# Altium PCB Eval_Board_Rev1.PcbDoc
Units mm, origin at the board's own origin, x right, y up, seen from the top; angles counter-clockwise.
Board outline 60 x 45 mm, 2 copper layers (Top Layer, Bottom Layer); 37 components, 15 nets, 82 pads, 13 vias.
Unrouted connection lines stored in the file: 2.
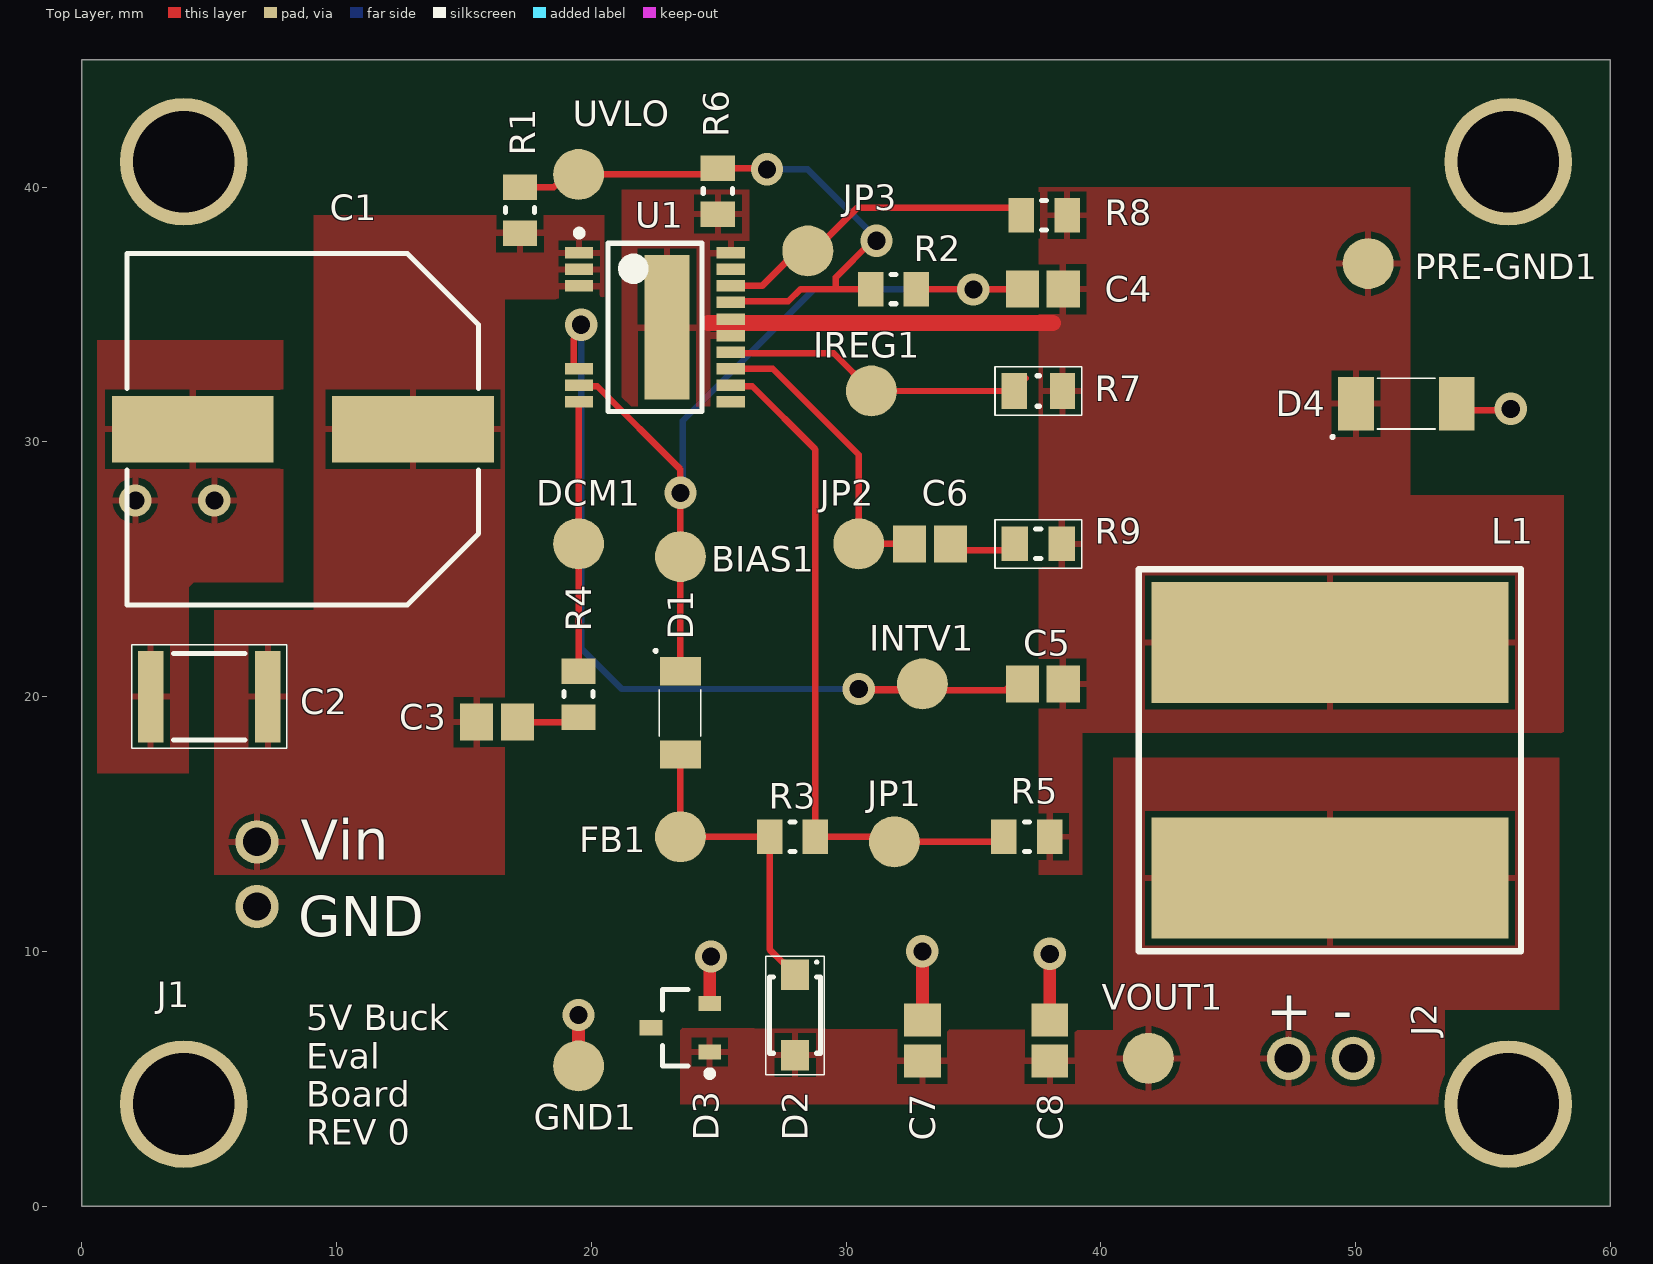
[diagram p0: Top Layer view]
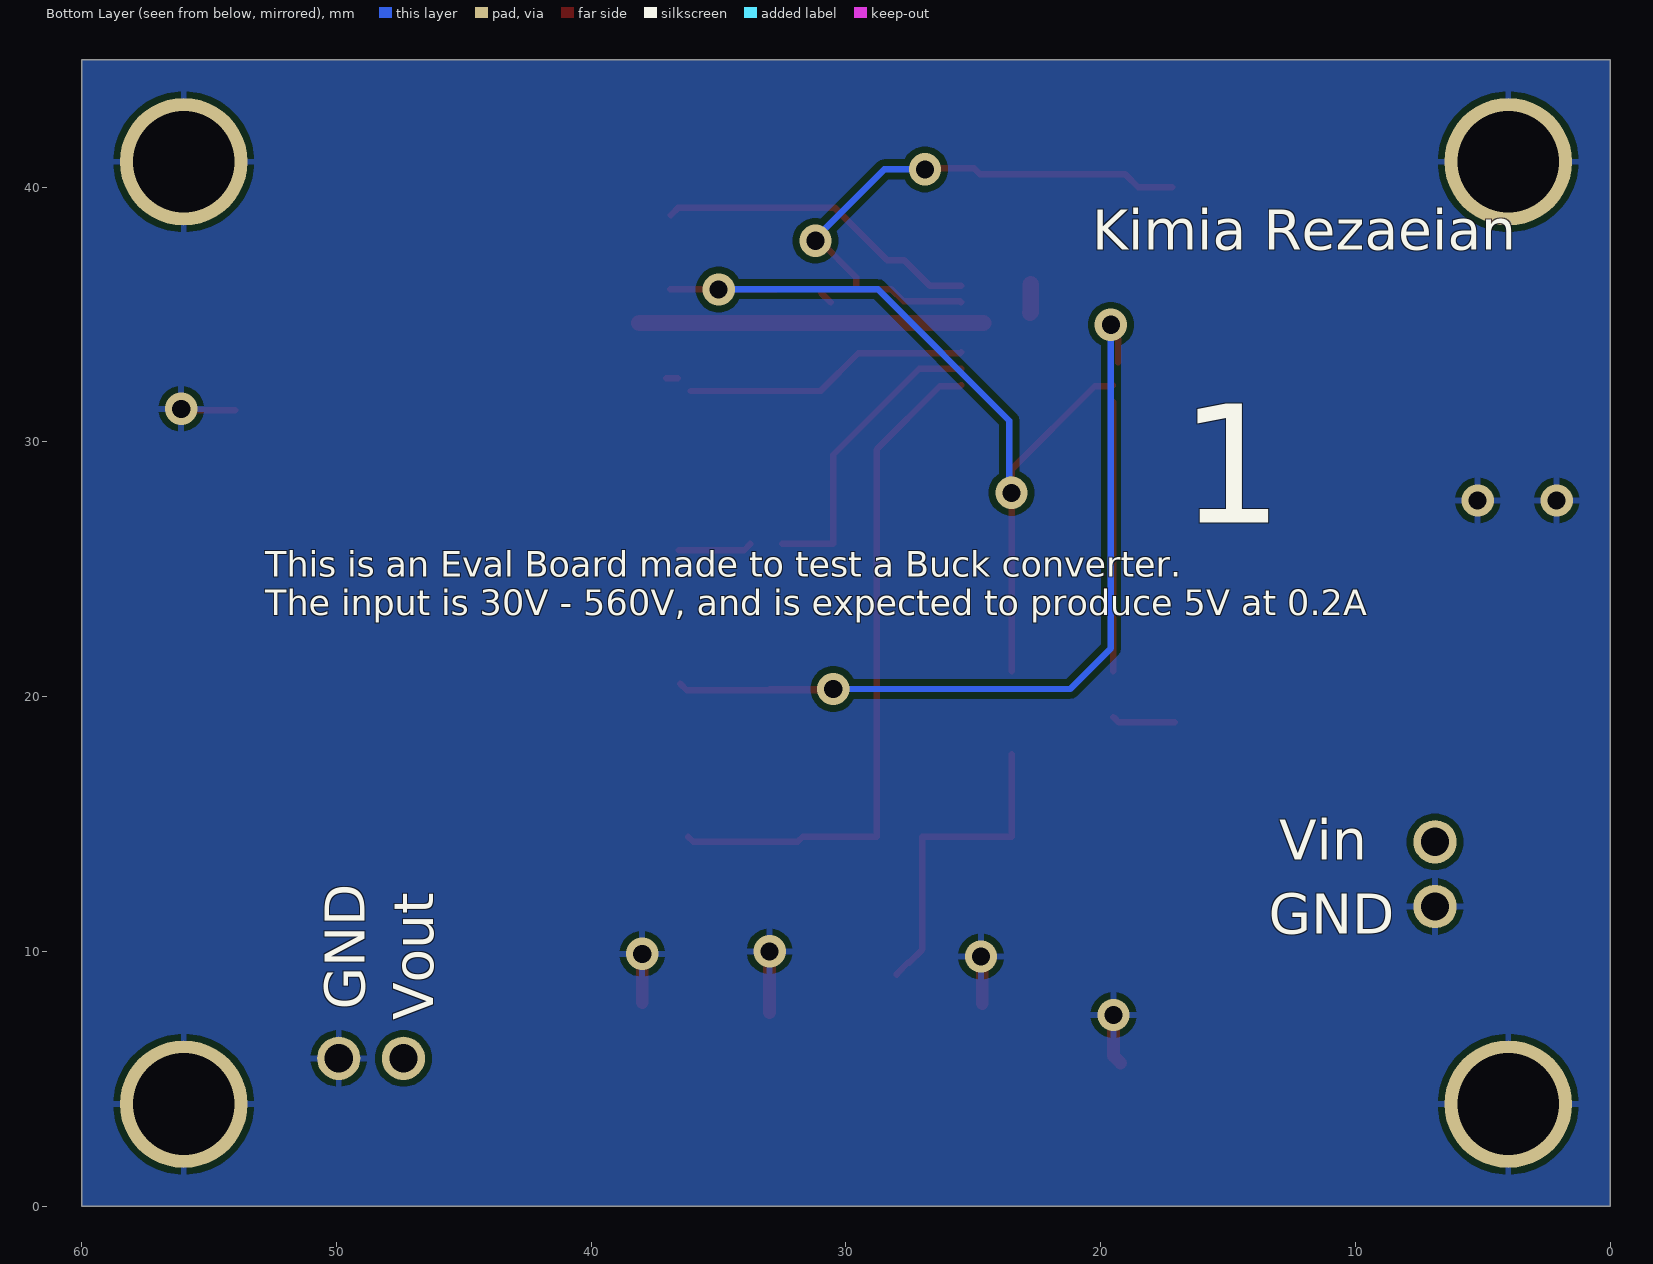
[diagram p1: Bottom Layer view, seen from below]
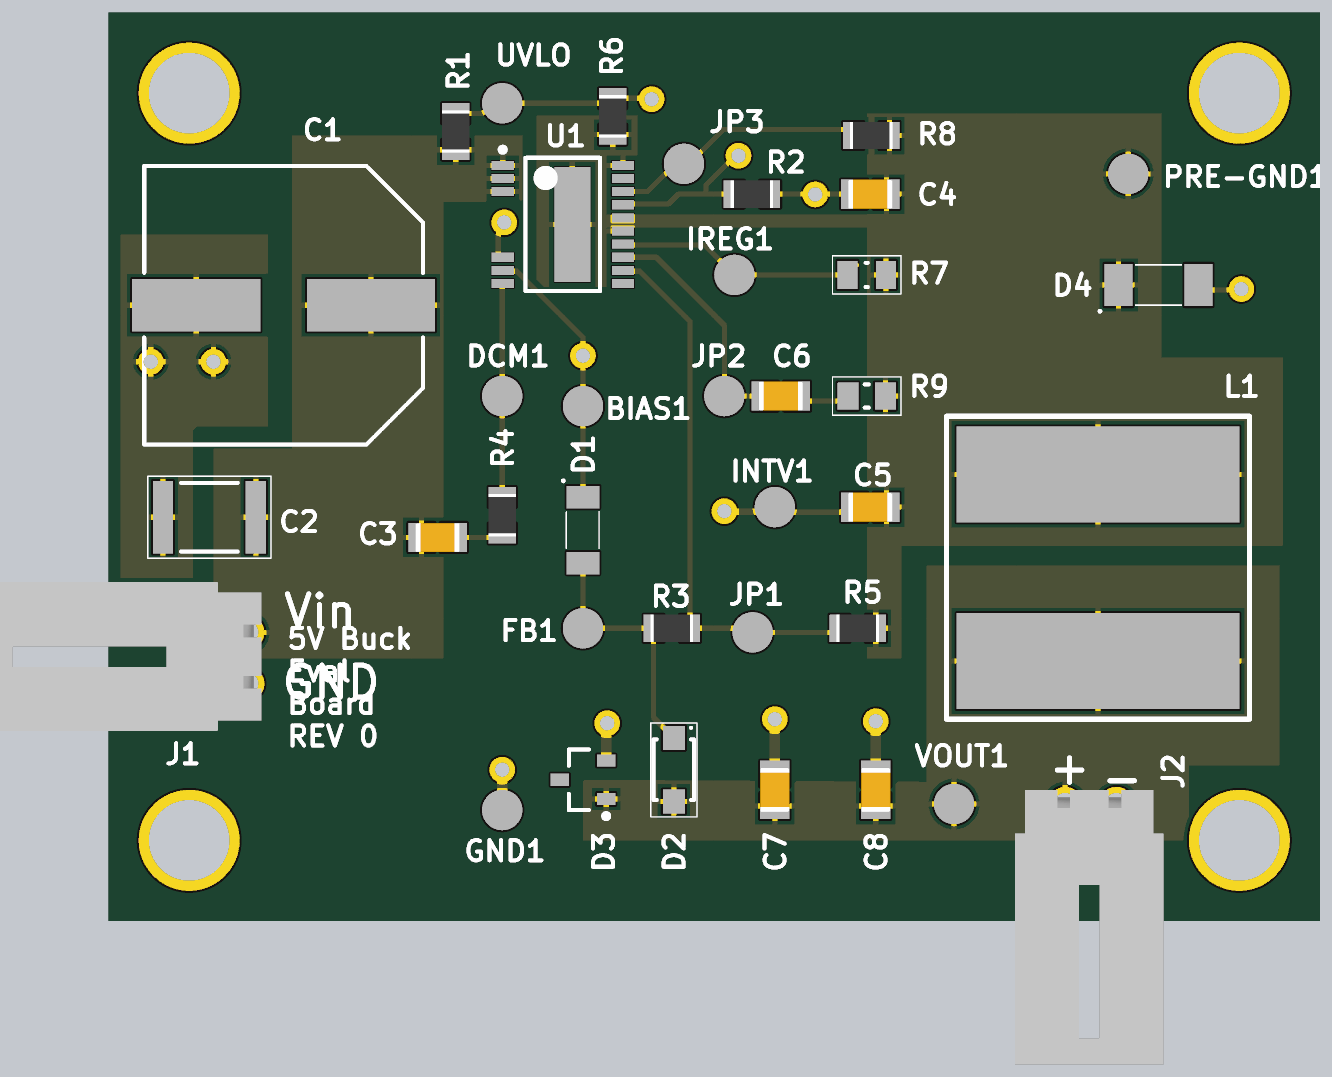
[diagram p2: 3D render of the assembled board from above, using the file's embedded part models]

## Layer stack, top to bottom
Top Solder: solder mask 0.0102, Solder Resist, Dk 3.5
Top Layer: signal copper 0.0356
Dielectric 1: dielectric 0.32, FR-4, Dk 4.8
Bottom Layer: signal copper 0.0356
Bottom Solder: solder mask 0.0102, Solder Resist, Dk 3.5

## Board outline
0,0 60,0 60,45 0,45

## Design rules (kind name [scope] priority, off if disabled: settings)
Clearance [All] p1: gap=0.254 ignorepadtopadclearanceinfootprint=TRUE except(0: Arc-Hole Track-Hole SMDPad-Hole THPad-Hole Via-Hole Fill-Hole Poly-Hole Region-Hole Text-Hole)
PolygonConnect [All] p1: connectstyle=Relief reliefconductorwidth=0.254 reliefentries=4 polygonreliefangle="90 Angle" airgapwidth=0.254
RoutingVias [All] p1: holewidth=0.711 width=1.27 viastyle="Through Hole" minholewidth=0.711 minwidth=1.27 maxholewidth=0.711 maxwidth=1.27
SolderMaskExpansion [All] p1: expansion=0.102 istentingtop=FALSE
Width [All] p1: maxlimit=2.54 minlimit=0.254 preferedwidth=0.254 minimp=50.000000 maximp=50.000000 favimp=50.000000
30 further rules are at their usual default settings.

## Classes and differential pairs
net class UVLO_Nets: UVLO
net class R6_Nets: PRE-GND UVLO
net class R2_Nets: BIAS UVLO
net class R1_Nets: UVLO Vin
net class R7_Nets: IREG PRE-GND
net class FB1_Nets: FB2
net class R4_Nets: DCM DCM2
net class D3_Nets: GND Vout
net class U1_Nets: BIAS DCM FB INTV IREG NetU1_11 NetU1_19 PRE-GND SOURCE UVLO VC Vin
net class R5_Nets: FB PRE-GND
net class R9_Nets: PRE-GND VC2
net class R8_Nets: PRE-GND SOURCE
net class R3_Nets: FB FB2
net class L1_Nets: PRE-GND Vout
net class GND1_Nets: GND
net class PRE-GND1_Nets: PRE-GND
net class VOUT1_Nets: Vout
net class IREG1_Nets: IREG
net class JP3_Nets: SOURCE
net class INTV1_Nets: INTV
net class JP2_Nets: VC
net class DCM1_Nets: DCM
net class JP1_Nets: FB
net class BIAS1_Nets: BIAS
net class J2_Nets: GND Vout
net class J1_Nets: GND Vin
net class D4_Nets: GND PRE-GND
net class D2_Nets: FB2 Vout
net class D1_Nets: BIAS FB2
net class C8_Nets: GND Vout
net class C7_Nets: GND Vout
net class C4_Nets: BIAS PRE-GND
net class C6_Nets: VC VC2
net class C5_Nets: INTV PRE-GND
net class C3_Nets: DCM2 Vin
net class C2_Nets: GND Vin
net class C1_Nets: GND Vin

## Components (designator, comment, footprint, x,y, rotation, side; value= is the part's Value field where it differs from the comment)
BIAS1 "Testpoint2" TP2 23.5,25.5 r0 top
C1 "3.3uF 450V" CAPAE125136X145M 8.675,30.5 r180 top
C2 "0.47uF 450V 1812" CAPC4532X28N 5,20 r180 top
C3 "10p" CAP-0805 16.3,19 r0 top
C4 "GRM21BR61E106MA73L" CAP-0805 37.728,36 r180 top
C5 "2.2u 16V" CAP-0805 37.728,20.5 r180 top
C6 "0.33u 10V" CAP-0805 33.3,26 r180 top
C7 "GRM21BR61A226ME51L" CAP-0805 33,6.5 r270 top
C8 "GRM21BR61A226ME51L" CAP-0805 38,6.5 r270 top
D1 "30V" PMEG3010EGWX 23.5,21 r270 top
D2 "CMMR1U-06TRPBFREE" SODFL375X108-2N 28,7.5 r270 top
D3 "5.1V" SOT95P230X110-3N 23.5,7 r180 top
D4 "600V" D3 52,31.5 r0 top
DCM1 "Testpoint2" TP2 19.5,26 r0 top
FB1 "Testpoint2" TP2 23.5,14.5 r0 top
GND1 "Testpoint2" TP2 19.5,5.5 r90 top
INTV1 "Testpoint2" TP2 33,20.5 r0 top
IREG1 "Testpoint2" TP2 31,32 r90 top
J1 "WM4153-ND" 2PIN 6.875,14.3 r270 top
J2 "WM4153-ND" 2PIN 47.375,5.8 r0 top
JP1 "Testpoint2" TP2 31.9,14.3 r0 top
JP2 "Testpoint2" TP2 30.5,26 r0 top
JP3 "Testpoint2" TP2 28.5,37.5 r0 top
L1 "270uH 1.2A" PCBComponent_1 49,17.5 r0 top
PRE-GND1 "Testpoint2" TP2 50.5,37 r90 top
R1 "DNP" RES-0805 17.2,39.1 r90 top
R2 "DNP" RES-0805 31.867,36 r180 top
R3 "RMCF0805FT15K4" RES-0805 27.9,14.5 r180 top
R4 "RNCP0805FTD4K99" RES-0805 19.5,20.1 r90 top
R5 "CRCW08055K00JNTA" RES-0805 37.1,14.5 r180 top
R6 "DNP" RES-0805 24.971,39.846 r270 top
R7 "43k" RESC2012X05N 37.55,32 r180 top
R8 "180m" RES-0805 37.778,38.9 r180 top
R9 "22.1k" RESC2012X06N 37.55,26 r180 top
U1 "LT8315EFE#PBF" TSOP65P650X120-20N 22.5,34.5 r0 top
UVLO "Testpoint2" TP2 19.5,40.5 r90 top
VOUT1 "Testpoint2" TP2 41.875,5.8 r90 top

## Footprints (in the part's own frame and the unit in brackets; to place one, negate y for a bottom-side part, rotate by r counter-clockwise, add the part's x,y. Pads: shape width x height; smd on the part's side, far side on the other; paste and mask are expansions set on the pad)
2PIN [mm]
  round 1.7 hole 1.11: 1(0,0) 2(2.54,0)
  body extent -2.48,-12.89 4.88,0.7, height 7.06
CAP-0805 [mm] "Chip Capacitor, 2-Leads, Body 2.00x1.25mm, IPC Medium Density"
  rect 1.3x1.45 smd: 1(-0.8,0) 2(0.8,0)
  body extent -1.1,-0.72 1.1,0.72, height 1.35
CAPAE125136X145M [mm] "Aluminum Electrolytic Capacitor, Body 13.60x13.60x14.50mm, IPC Low Density"
  rect 6.35x2.6 smd: 1(-4.325,0) 2(4.325,0)
  silkscreen extent -6.9,-6.9 6.9,6.9, body extent -6.9,-6.9 6.9,6.9, height 14.5
CAPC4532X28N [mm] "Chip Capacitor, 2-Leads, Body 4.50x3.20mm, IPC Medium Density"
  rect 1x3.6 smd: 1(-2.3,0) 2(2.3,0)
  silkscreen extent -3.05,-2.03 3.05,2.03, body extent -2.45,-1.8 2.45,1.8, height 2.8
D3 [mm]
  rect 1.4x2.1 smd: 1(-1.98,0) 2(1.98,0)
  silkscreen extent -2.94,-1.34 1.13,1
PCBComponent_1 [mm]
  rect 14x4.75 smd: 1(0,4.625) 2(0,-4.625)
  silkscreen extent -7.5,-7.5 7.5,7.5
PMEG3010EGWX [mm]
  rect 1.11x1.62 smd: 1(0,0) 2(3.27,0)
  silkscreen extent -0.84,-1.01 2.55,0.8
RES-0805 [mm] "Chip Resistor, 2-Leads, Body 2.00x1.25mm, IPC Medium Density"
  rect 1x1.35 smd: 1(-0.9,0) 2(0.9,0)
  silkscreen extent -0.1,-0.58 0.1,0.58, body extent -1.05,-0.67 1.05,0.67, height 0.6
RESC2012X05N [mm] "Chip Resistor, 2-Leads, Body 2.05x1.25mm, IPC Medium Density"
  rect 1x1.4 smd: 1(-0.95,0) 2(0.95,0)
  silkscreen extent -1.7,-0.95 1.7,0.95, body extent -1.1,-0.7 1.1,0.7, height 0.5
RESC2012X06N [mm] "21.1k"
  rect 1.05x1.35 smd: 1(-0.925,0) 2(0.925,0)
  silkscreen extent -1.7,-0.95 1.7,0.95, body extent -1.1,-0.67 1.1,0.67, height 0.65
SODFL375X108-2N [mm] "SODFL, 2-Leads, Body 1.80x3.75mm, IPC Medium Density"
  rect 1.2x1.1 smd: 1(-1.575,0) 2(1.575,0)
  silkscreen extent -2.31,-1.14 2.34,1.14, body extent -1.48,-0.97 1.47,0.97, height 1.08
SOT95P230X110-3N [mm] "SOT23, 3-Leads, Body 2.90x2.30mm, Pitch 0.95mm, IPC Medium Density"
  rect 0.9x0.6 smd: 1(-1.15,0.95) 2(-1.15,-0.95) 3(1.15,0)
  silkscreen extent -1.28,-1.5 0.7,1.92, body extent -0.7,-1.5 0.7,1.5, height 1.1
TP2 [mm]
  round 2 smd: 1(0,0)
TSOP65P650X120-20N [mm] "TSOP, 20-Leads, Body 6.50x4.40mm, Pitch 0.65mm, IPC Medium Density"
  rect 1.1x0.45 smd mask+0.05: 1(-2.975,2.925) 2(-2.975,2.275) 3(-2.975,1.625) 8(-2.975,-1.625) 9(-2.975,-2.275) 10(-2.975,-2.925)
  rect 1.1x0.45 smd paste+0 mask+0.05: 11(2.975,-2.925) 12(2.975,-2.275) 13(2.975,-1.625) 14(2.975,-0.975) 15(2.975,-0.325) 16(2.975,0.325) 17(2.975,0.975) 18(2.975,1.625) 19(2.975,2.275) 20(2.975,2.925)
  rect 1.78x5.68 smd mask+0.05: 21(0.47,0)
  silkscreen extent -3.1,-3.3 1.85,3.82, body extent -2.25,-3.3 2.25,3.3, height 1.2

## Part data
BIAS1 DCM1 FB1 GND1 INTV1 IREG1 JP1 JP2 JP3 PRE-GND1 UVLO VOUT1: "Single layer pad TP"
C1: library part UUJ2W3R3MNQ1MS, "Al Cap UJ series SMT 3.3uF 450V", Capacitance=3.3uF, Case/Package=Radial, Leakage Current=100uA, Manufacturer=Nichicon, Max Operating Temperature=105°C, Min Operating Temperature=-40°C, Package Quantity=500, Ripple Current=40mA, Supplier Part Number 1=493-16089-1-ND, Tolerance=20%, Voltage=450V, Category="Aluminum Electrolytic Capacitors", ComponentLink1Description=https://datasheet.ciiva.com/11781/0900766b80fa39e6-11781932.pdf?src-supplier=RSComponents, ComponentLink1URL=https://datasheet.ciiva.com/11781/0900766b80fa39e6-11781932.pdf?src-supplier=RSComponents, ComponentLink2Description=https://datasheet.ciiva.com/11687/e-uj-11687990.pdf?src-supplier=Avnet, ComponentLink2URL=https://datasheet.ciiva.com/11687/e-uj-11687990.pdf?src-supplier=Avnet, Construction=Cylindrical, Diameter=12.5mm, Height=13.5mm, Height - Seated (Max)=0.571inch, Lead Diameter=1.4mm, Lead Pitch=4mm, Length=13.5mm, Life (Hours)=5000Hour, Manufacturer Part Number=UUJ2W3R3MNQ1MS, Mount="Surface Mount", Packaging="Tape and Reel", Polarity=Polar, Pricing 1="1=1.50000, 10=1.18700, 50=1.02860, 100=0.89010 (USD)", Radiation Hardening=No, RoHS=Yes, RoHS Compliant=Yes, Series=UJ, Stock 1=1639, Supplier 1=Digi-Key, Termination=SMD/SMT, Voltage Rating=450V, Voltage Rating (DC)=450V
C2: library part CGA8N4X7T2W474M230KA, "Automotive Grade MLCC, 1812, X7T, 450V, 0.47 F, 20%, 2.30mm", Capacitance=470nF, Case Code (Imperial)=1812, Case Code (Metric)=4532, Manufacturer=TDK, Max Operating Temperature=125°C, Min Operating Temperature=-55°C, Package Quantity=500, Ratings=AEC-Q200, Supplier Part Number 1=445-13132-1-ND, Tolerance=20%, Voltage Rating=450V, Case/Package=1812, Category="Ceramic Capacitors", ComponentLink1Description=https://product.tdk.com/info/en/documents/chara_sheet/CGA8N4X7T2W474M230KA.pdf?src-supplier=Digi-Key, ComponentLink1URL=https://product.tdk.com/info/en/documents/chara_sheet/CGA8N4X7T2W474M230KA.pdf?src-supplier=Digi-Key, ComponentLink2Description=https://product.tdk.com/info/en/catalog/spec/mlccspec_automotive_general_midvoltage_en.pdf?src-supplier=Digi-Key, ComponentLink2URL=https://product.tdk.com/info/en/catalog/spec/mlccspec_automotive_general_midvoltage_en.pdf?src-supplier=Digi-Key, ComponentLink3Description=http://product.tdk.com/en/catalog/datasheets/mlcc_automotive_midvoltage_en.pdf?src-supplier=Avnet, ComponentLink3URL=http://product.tdk.com/en/catalog/datasheets/mlcc_automotive_midvoltage_en.pdf?src-supplier=Avnet, Length=0.177inch, Manufacturer Part Number=CGA8N4X7T2W474M230KA, Mount="Surface Mount", Packaging="Tape and Reel", Pricing 1="1=1.20000, 10=0.94400, 50=0.81800, 100=0.70780 (USD)", RoHS=Yes, Series=CGA, Stock 1=1741, Supplier 1=Digi-Key, Thickness=0.098inch, Width=0.126inch
C3: library part GCQ1555C1H9R6DB01D, "CAP CER 0805 10PF 25V", Manufacturer=Murata, Category="Ceramic Capacitors", Manufacturer Part Number=GCQ1555C1H9R6DB01D, Pricing 1="1=0.14620, 10=0.10040, 25=0.09950, 100=0.05630, 250=0.05570, 500=0.03880, 1000=0.03350, 3000=0.03160, 6000=0.02890, 10000=0.05540 (USD)", RoHS=Yes, Stock 1=10000, Supplier 1="Arrow Electronics", Supplier Part Number 1=GCQ1555C1H9R6DB01D
C4: "Capacitor, 10 µF, 25 V, 0805 [2012 Metric], ± 20%, X5R, GRM Series", Capacitance=10uF, Case Code (Imperial)=0805, Case Code (Metric)=2012, Dielectric=X5R, Manufacturer=Murata, Max Operating Temperature=85°C, Min Operating Temperature=-55°C, Package Quantity=3000, Resistor Type=Ceramic, Supplier Part Number 1=490-10748-1-ND, Tolerance=20%, Voltage Rating=25V, Case/Package=0805, Category="Ceramic Capacitors", ComponentLink1Description=http://www.farnell.com/datasheets/2079185.pdf?src-supplier=Farnell, ComponentLink1URL=http://www.farnell.com/datasheets/2079185.pdf?src-supplier=Farnell, ComponentLink2Description=http://www.mouser.com/ds/2/281/c02e-2905.pdf?src-supplier=Mouser, ComponentLink2URL=http://www.mouser.com/ds/2/281/c02e-2905.pdf?src-supplier=Mouser, ComponentLink3Description=http://components.arrow.com/part/dataview/0323_03061623?src-supplier=Arrow+Europe, ComponentLink3URL=http://components.arrow.com/part/dataview/0323_03061623?src-supplier=Arrow+Europe, ComponentLink4Description=https://search.murata.co.jp/Ceramy/image/img/A01X/G101/ENG/GRM21BR61E106MA73-01.pdf?src-supplier=Digi-Key, ComponentLink4URL=https://search.murata.co.jp/Ceramy/image/img/A01X/G101/ENG/GRM21BR61E106MA73-01.pdf?src-supplier=Digi-Key, ComponentLink5Description=http://www.farnell.com/datasheets/2079185.pdf?src-supplier=Element14, ComponentLink5URL=http://www.farnell.com/datasheets/2079185.pdf?src-supplier=Element14, Depth=1.25mm, Height=1.25mm, Lead Free="Lead Free", Length=2mm, Manufacturer Part Number=GRM21BR61E106MA73L, Mount="Surface Mount", Packaging="Tape and Reel", Pricing 1="1=0.26000, 10=0.17900, 50=0.11960, 100=0.10170, 500=0.07176, 1000=0.06279 (USD)", REACH SVHC="No SVHC", RoHS=Yes, RoHS Compliant=Yes, Stock 1=357812, Supplier 1=Digi-Key, Termination=SMD/SMT, Thickness=0.055inch, Voltage Rating (DC)=25V, Weight=0.000335oz, Width=0.049inch
C5: library part CL21B225KOFNFNE, "Cap Ceramic 2.2uF 16V X7R 10% SMD 0805 125C Embossed T/R", Capacitance=2.2uF, Case Code (Imperial)=0805, Case Code (Metric)=2012, Dielectric=X7R, Manufacturer=Samsung, Max Operating Temperature=125°C, Min Operating Temperature=-55°C, Package Quantity=1, Supplier Part Number 1=1276-2956-1-ND, Tolerance=10%, Voltage Rating=16V, Case/Package=0805, Category="Ceramic Capacitors", ComponentLink1Description=https://datasheet.ciiva.com/25713/cl21b225kofnfne-25713539.pdf?src-supplier=Digi-Key, ComponentLink1URL=https://datasheet.ciiva.com/25713/cl21b225kofnfne-25713539.pdf?src-supplier=Digi-Key, Construction=Flat, Contact Plating=Tin, Depth=1.25mm, Height=1.25mm, Length=0.079inch, Manufacturer Part Number=CL21B225KOFNFNE, Mount="Surface Mount", Packaging="Tape and Reel", Pricing 1="1=0.16000, 10=0.11500, 50=0.06520, 100=0.05400, 500=0.03784, 1000=0.03133 (USD)", Radiation Hardening=No, RoHS=Yes, RoHS Compliant=Yes, Series=CL, Stock 1=143505, Supplier 1=Digi-Key, Thickness=0.053inch, Width=0.049inch
C6: library part CGJ4J2X7R1A334K125AA, "CAP CER 0.33UF 10V X7R 0805", Capacitance=330nF, Case Code (Imperial)=0805, Case Code (Metric)=2012, Dielectric=X7R, Manufacturer=TDK, Max Operating Temperature=125°C, Min Operating Temperature=-55°C, Package Quantity=1, Ratings=COTS, Resistor Type=Ceramic, Supplier Part Number 1=445-8191-1-ND, Tolerance=10%, Voltage Rating=10V, Case/Package=0805, Category="Ceramic Capacitors", ComponentLink1Description=https://datasheet.ciiva.com/15192/getdatasheetpartid-715821-15192531.pdf?src-supplier=Verical, ComponentLink1URL=https://datasheet.ciiva.com/15192/getdatasheetpartid-715821-15192531.pdf?src-supplier=Verical, Depth=1.25mm, Height=1.25mm, Length=2mm, Manufacturer Part Number=CGJ4J2X7R1A334K125AA, Mount="Surface Mount", Packaging="Tape and Reel", Pricing 1="1=0.37000, 10=0.26000, 50=0.18220, 100=0.15610, 500=0.11706, 1000=0.09886 (USD)", Radiation Hardening=No, RoHS=Yes, RoHS Compliant=Yes, Series=CGJ, Stock 1=991, Supplier 1=Digi-Key, Termination=SMD/SMT, Thickness=0.057inch, Voltage Rating (DC)=10V, Weight=0.000194oz, Width=1.2mm
C7 C8: "CAP, MLCC, X5R, 22UF, 10V, 0805", Capacitance=22uF, Case Code (Imperial)=0805, Case Code (Metric)=2012, Dielectric=X5R, Manufacturer=Murata, Max Operating Temperature=85°C, Min Operating Temperature=-55°C, Package Quantity=3000, Supplier Part Number 1=490-10511-1-ND, Tolerance=20%, Voltage Rating=10V, Case/Package=0805, Category="Ceramic Capacitors", ComponentLink1Description=http://www.farnell.com/datasheets/1955716.pdf?src-supplier=Farnell, ComponentLink1URL=http://www.farnell.com/datasheets/1955716.pdf?src-supplier=Farnell, ComponentLink2Description=http://www.mouser.com/ds/2/281/c02e-2905.pdf?src-supplier=Mouser, ComponentLink2URL=http://www.mouser.com/ds/2/281/c02e-2905.pdf?src-supplier=Mouser, ComponentLink3Description=http://components.arrow.com/part/dataview/0323_06961245?src-supplier=Arrow+Europe, ComponentLink3URL=http://components.arrow.com/part/dataview/0323_06961245?src-supplier=Arrow+Europe, ComponentLink4Description=http://psearch.en.murata.com/capacitor/product/GRM21BR61A226ME51%23.html?src-supplier=Avnet, ComponentLink4URL=http://psearch.en.murata.com/capacitor/product/GRM21BR61A226ME51%23.html?src-supplier=Avnet, ComponentLink5Description=http://search.murata.co.jp/Ceramy/image/img/A01X/G101/ENG/GRM21BR61A226ME51-01.pdf?src-supplier=Digi-Key, ComponentLink5URL=http://search.murata.co.jp/Ceramy/image/img/A01X/G101/ENG/GRM21BR61A226ME51-01.pdf?src-supplier=Digi-Key, ComponentLink6Description=http://www.farnell.com/datasheets/1955716.pdf?src-supplier=Newark, ComponentLink6URL=http://www.farnell.com/datasheets/1955716.pdf?src-supplier=Newark, ComponentLink7Description=http://www.farnell.com/datasheets/1955716.pdf?src-supplier=Element14, ComponentLink7URL=http://www.farnell.com/datasheets/1955716.pdf?src-supplier=Element14, Depth=1.25mm, Height=1.25mm, Lead Free="Lead Free", Length=2mm, Manufacturer Part Number=GRM21BR61A226ME51L, Mount="Surface Mount", Packaging="Tape and Reel", Pricing 1="1=0.28000, 10=0.19200, 50=0.12800, 100=0.10890, 500=0.07684, 1000=0.06723 (USD)", Radiation Hardening=No, REACH SVHC="No SVHC", RoHS=Yes, RoHS Compliant=Yes, Stock 1=665311, Supplier 1=Digi-Key, Termination=SMD/SMT, Thickness=0.055inch, Voltage Rating (DC)=10V, Weight=0.000335oz, Width=0.049inch
D1: library part PMEG3010EGWX, Manufacturer=Nexperia, Supplier Part Number 1=1727-7343-1-ND, Category="Schottky Diodes", Manufacturer Part Number=PMEG3010EGWX, Pricing 1="1=0.31000, 10=0.25200, 100=0.13360, 500=0.08786, 1000=0.05975 (USD)", RoHS=Yes, RoHS Compliant=Yes, Stock 1=5980, Supplier 1=Digi-Key
D2: "Diode Switching 600V 1A Automotive 2-Pin SOD-123F T/R. https://my.centralsemi.com/datasheets/CMMR1U_SERIES.PDF", Case/Package=SOD, Forward Voltage=1.7V, Manufacturer="Central Semiconductor", Max Operating Temperature=150°C, Min Operating Temperature=-65°C, Peak Non-Repetitive Surge Current=30A, Supplier Part Number 1=1514-CMMR1U-06TRPBFREECT-ND, Category=Uncategorized, ComponentLink1Description=https://datasheet.ciiva.com/26939/getdatasheetpartid-707878-26939601.pdf?src-supplier=Verical, ComponentLink1URL=https://datasheet.ciiva.com/26939/getdatasheetpartid-707878-26939601.pdf?src-supplier=Verical, Element Configuration=Single, Manufacturer Part Number=CMMR1U-06TRPBFREE, Mount="Surface Mount", Number of Pins=2, Packaging="Tape and Reel", Pricing 1="1=0.82000, 10=0.72600, 100=0.55660, 500=0.44000, 1000=0.35200 (USD)", Radiation Hardening=No, RoHS=Yes, RoHS Compliant=Yes, Stock 1=10653, Supplier 1=Digi-Key
D3: library part BZX84-C5V1,215, "Zener Diode Single 5.1V 5% 60Ohm 250mW Automotive 3-Pin SOT-23 T/R", Manufacturer=Nexperia, Supplier Part Number 1=1727-2939-1-ND, ComponentLink1Description=http://www.farnell.com/datasheets/2242065.pdf?src-supplier=Farnell, ComponentLink1URL=http://www.farnell.com/datasheets/2242065.pdf?src-supplier=Farnell, ComponentLink2Description=https://assets.nexperia.com/documents/data-sheet/BZX84_SER.pdf?src-supplier=Digi-Key, ComponentLink2URL=https://assets.nexperia.com/documents/data-sheet/BZX84_SER.pdf?src-supplier=Digi-Key, Manufacturer Part Number=BZX84-C5V1,215, Pricing 1="1=0.14000, 10=0.12900, 100=0.07000, 500=0.04308, 1000=0.02937 (USD)", RoHS=Yes, RoHS Compliant=Yes, Stock 1=23070, Supplier 1=Digi-Key
D4: library part HS2JFSM3G, Manufacturer="Taiwan Semiconductor", Supplier Part Number 1=1801-HS2JFSM3GCT-ND, Manufacturer Part Number=HS2JFSM3G, Pricing 1="1=0.45000, 10=0.38700, 100=0.28900, 500=0.22704, 1000=0.17544 (USD)", RoHS=No, Stock 1=3460, Supplier 1=DigiKey
J1 J2: library part 2PIN, "CONN HEADER R/A 2POS 2.54MM", Color=Black, Contact Resistance=30mR, Manufacturer=Molex, Manufacturer Part Number=0705530106, Max Operating Temperature=105°C, Min Operating Temperature=-40°C, ComponentLink1Description=http://www.molex.com/webdocs/datasheets/pdf/en-us/0705530106_PCB_HEADERS.pdf?src-supplier=Avnet+Asia, ComponentLink1URL=http://www.molex.com/webdocs/datasheets/pdf/en-us/0705530106_PCB_HEADERS.pdf?src-supplier=Avnet+Asia, ComponentLink2Description=https://www.molex.com/pdm_docs/ps/PS-70400.pdf?src-supplier=Digi-Key, ComponentLink2URL=https://www.molex.com/pdm_docs/ps/PS-70400.pdf?src-supplier=Digi-Key, Connector Type="Male Pin", Contact Material=Bronze, Contact Mating Length=0.24inch, Contact Plating=Gold, Depth=13.59mm, Housing Color=Black, Housing Material=Polyester, Length=7.37mm, Mount="Through Hole", Number of Contacts=2, Number of Positions=2, Number of Rows=1, Orientation="Right Angle", Packaging=Rail/Tube, Pitch=2.54mm, Pricing 1="1=1.38, 10=1.25, 100=1.071, 500=0.8925, 1000=0.765, 5000=0.6783, 10000=0.663 (USD)", Stock 1=2224, Supplier 1=Digi-Key, Supplier Part Number 1=WM4153-ND, Termination=Solder
L1: library part SDR1307-271KL, "FIXED IND 270UH 1.2A 410 MOHM", Case/Package=Nonstandard, Current Rating=1.2A, DC Resistance (DCR)=410mR, Inductance=270uH, Inductance Tolerance=10%, Manufacturer=Bourns, Max Operating Temperature=125°C, Min Operating Temperature=-40°C, Package Quantity=400, Resistor Type=Wirewound, Saturation Current=1.8A, Self Resonant Frequency=3.5MHz, Supplier Part Number 1=SDR1307-271KLCT-ND, Test Frequency=100kHz, Category="Fixed Inductors", ComponentLink1Description=https://datasheet.ciiva.com/1060/sdr1307-1060134.pdf?src-supplier=Digi-Key, ComponentLink1URL=https://datasheet.ciiva.com/1060/sdr1307-1060134.pdf?src-supplier=Digi-Key, ComponentLink2Description=https://datasheet.ciiva.com/1060/sdr1307-1060135.pdf?src-supplier=Digi-Key, ComponentLink2URL=https://datasheet.ciiva.com/1060/sdr1307-1060135.pdf?src-supplier=Digi-Key, ComponentLink3Description=https://datasheet.ciiva.com/8515/sdr1307-8515135.pdf?src-supplier=Avnet, ComponentLink3URL=https://datasheet.ciiva.com/8515/sdr1307-8515135.pdf?src-supplier=Avnet, ComponentLink4Description=https://datasheet.ciiva.com/6708/sdr1307-6708549.pdf?src-supplier=Digi-Key, ComponentLink4URL=https://datasheet.ciiva.com/6708/sdr1307-6708549.pdf?src-supplier=Digi-Key, ComponentLink5Description=https://datasheet.ciiva.com/22715/1723200-22715551.pdf?src-supplier=Element14, ComponentLink5URL=https://datasheet.ciiva.com/22715/1723200-22715551.pdf?src-supplier=Element14, ComponentLink6Description=https://datasheet.ciiva.com/30244/sdr1307-30244511.pdf?src-supplier=Onlinecomponents.com, ComponentLink6URL=https://datasheet.ciiva.com/30244/sdr1307-30244511.pdf?src-supplier=Onlinecomponents.com, Core Material=Ferrite, DC Current=1.2A, Diameter=13mm, Height=0.276inch, Height - Seated (Max)=0.288inch, Length=0.512inch, Manufacturer Part Number=SDR1307-271KL, Max DC Current=1.2A, Military Standard=Not, Mount="Surface Mount", Packaging="Tape and Reel", Pricing 1="1=1.10000, 10=1.02200, 25=0.94400, 50=0.78640, 100=0.73930 (USD)", Q Factor=15, Radiation Hardening=No, REACH SVHC="No SVHC", RMS Current (Irms)=1.2A, RoHS=Yes, Series=SDR1307, Shielding=Unshielded, Stock 1=932, Supplier 1=Digi-Key, Termination=SMD/SMT, Tolerance=10%, Width=0.512inch
R1: library part CRCW0805100RFKEA, "Res Thick Film 0805 100 Ohm 1% 1/8W ±100ppm/°C Molded SMD Paper T/R", Case Code (Imperial)=0805, Case Code (Metric)=2012, Manufacturer="Vishay Dale", Max Operating Temperature=155°C, Max Power Dissipation=125mW, Min Operating Temperature=-55°C, Package Quantity=10, Resistance=100R, Resistance Tolerance=1%, Resistor Type="Thick Film", Supplier Part Number 1=541-100CCT-ND, Temperature Coefficient=100ppm/°C, Voltage Rating=150V, Case/Package=0805, Category="Chip SMD Resistors", ComponentLink1Description=https://datasheet.ciiva.com/11809/0900766b80d98b26-11809126.pdf?src-supplier=RSComponents, ComponentLink1URL=https://datasheet.ciiva.com/11809/0900766b80d98b26-11809126.pdf?src-supplier=RSComponents, ComponentLink2Description=https://datasheet.ciiva.com/2495/dcrcwe3-2495843.pdf?src-supplier=Digi-Key, ComponentLink2URL=https://datasheet.ciiva.com/2495/dcrcwe3-2495843.pdf?src-supplier=Digi-Key, ComponentLink3Description=https://datasheet.ciiva.com/2495/dcrcwe3-2495844.pdf?src-supplier=Digi-Key, ComponentLink3URL=https://datasheet.ciiva.com/2495/dcrcwe3-2495844.pdf?src-supplier=Digi-Key, ComponentLink4Description=https://datasheet.ciiva.com/5546/dcrcwe3-109170-5546700.pdf?src-supplier=Mouser, ComponentLink4URL=https://datasheet.ciiva.com/5546/dcrcwe3-109170-5546700.pdf?src-supplier=Mouser, ComponentLink5Description=https://datasheet.ciiva.com/3258/dcrcwe3-3258011.pdf?src-supplier=Avnet, ComponentLink5URL=https://datasheet.ciiva.com/3258/dcrcwe3-3258011.pdf?src-supplier=Avnet, ComponentLink6Description=https://datasheet.ciiva.com/8337/dcrcwe3-8337753.pdf?src-supplier=Avnet, ComponentLink6URL=https://datasheet.ciiva.com/8337/dcrcwe3-8337753.pdf?src-supplier=Avnet, ComponentLink7Description=https://datasheet.ciiva.com/2495/dcrcwe3-2495842.pdf?src-supplier=Digi-Key, ComponentLink7URL=https://datasheet.ciiva.com/2495/dcrcwe3-2495842.pdf?src-supplier=Digi-Key, ComponentLink8Description=https://datasheet.ciiva.com/16514/dcrcwe3-16514904.pdf?src-supplier=Avnet+Asia, ComponentLink8URL=https://datasheet.ciiva.com/16514/dcrcwe3-16514904.pdf?src-supplier=Avnet+Asia, ComponentLink9Description=https://datasheet.ciiva.com/15159/getdatasheetpartid-90825-15159895.pdf?src-supplier=Verical, ComponentLink9URL=https://datasheet.ciiva.com/15159/getdatasheetpartid-90825-15159895.pdf?src-supplier=Verical, ComponentLink10Description=https://datasheet.ciiva.com/16760/70201119-16760940.pdf?src-supplier=Allied+Electronics, ComponentLink10URL=https://datasheet.ciiva.com/16760/70201119-16760940.pdf?src-supplier=Allied+Electronics, ComponentLink11Description=https://datasheet.ciiva.com/16777/70201119-16777129.pdf?src-supplier=Allied+Electronics, ComponentLink11URL=https://datasheet.ciiva.com/16777/70201119-16777129.pdf?src-supplier=Allied+Electronics, Construction=Rectangular, Contact Plating=Tin, Depth=1.25mm, Features="Automotive AEC-Q200", Height=0.45mm, Lead Free="Lead Free", Length=2mm, Manufacturer Part Number=CRCW0805100RFKEA, Military Standard=Not, Mount="Surface Mount", Number of Pins=2, Number of Terminations=2, Packaging="Tape and Reel", Power Rating=125mW, Pricing 1="1=0.10000, 10=0.06700, 100=0.02710, 1000=0.01219, 2500=0.01058 (USD)", Radiation Hardening=No, REACH SVHC=Unknown, RoHS=Yes, RoHS Compliant=Yes, Series=CRCW, Size Code=0805, Stock 1=14649, Supplier 1=Digi-Key, Technology="THICK FILM", Termination=SMD/SMT, Tolerance=1%, Voltage Rating (DC)=150V, Weight=0.000194oz, Width=0.049inch
R2: library part AC0805JR-070RL, "Fixed Resistor, Metal Glaze/thick Film, 0.125W, 0ohm, Surface Mount, 0805", Case Code (Imperial)=0805, Case Code (Metric)=2012, Manufacturer=Yageo, Max Operating Temperature=155°C, Max Power Dissipation=125mW, Min Operating Temperature=-55°C, Resistance=0R, Resistor Type="Thick Film", Supplier Part Number 1=YAG3755CT-ND, Temperature Coefficient=200ppm/°C, Tolerance=5%, Voltage Rating=150V, Case/Package=0805, Category="Chip SMD Resistors", ComponentLink1Description=http://www.yageo.com/NewPortal/yageodocoutput?fileName=/pdf/R-Chip/PYu-AC_51_RoHS_L_6.pdf&src-supplier=Digi-Key, ComponentLink1URL=http://www.yageo.com/NewPortal/yageodocoutput?fileName=/pdf/R-Chip/PYu-AC_51_RoHS_L_6.pdf&src-supplier=Digi-Key, ComponentLink2Description=http://www.yageo.com/documents/recent/PYu-AC_51_RoHS_L_2.pdf?src-supplier=Mouser, ComponentLink2URL=http://www.yageo.com/documents/recent/PYu-AC_51_RoHS_L_2.pdf?src-supplier=Mouser, Features="Moisture Resistant,Automotive AEC-Q200", Height=0.024inch, Lead Free="Lead Free", Length=0.079inch, Manufacturer Part Number=AC0805JR-070RL, Number of Terminations=2, Packaging="Tape and Reel", Power Rating=125mW, Pricing 1="1=0.10000, 10=0.03700, 25=0.02680, 50=0.02040, 100=0.01500, 250=0.01148, 500=0.00918, 1000=0.00676 (USD)", RoHS=Yes, Series=AC, Stock 1=12402, Supplier 1=Digi-Key, Termination=SMD/SMT, Width=1.25mm
R3: "RES 15.4K OHM 1% 1/8W 0805", Case Code (Imperial)=0805, Case Code (Metric)=2012, Manufacturer="Stackpole Electronics", Max Operating Temperature=155°C, Max Power Dissipation=125mW, Min Operating Temperature=-55°C, Resistance=15.4k, Resistor Type="Thick Film", Supplier Part Number 1=RMCF0805FT15K4CT-ND, Temperature Coefficient=100ppm/°C, Tolerance=1%, Case/Package=0805, Category="Chip SMD Resistors", ComponentLink1Description=https://datasheet.ciiva.com/26835/getdatasheetpartid-701388-26835687.pdf?src-supplier=Verical, ComponentLink1URL=https://datasheet.ciiva.com/26835/getdatasheetpartid-701388-26835687.pdf?src-supplier=Verical, Construction=Rectangular, Contact Plating=Tin,Matte, Depth=1.25mm, Features="Automotive AEC-Q200", Height=0.026inch, Length=0.079inch, Manufacturer Part Number=RMCF0805FT15K4, Military Standard=Not, Mount="Surface Mount", Number of Terminations=2, Packaging="Tape and Reel", Pricing 1="1=0.10000, 10=0.02700, 100=0.01090, 1000=0.00488, 2500=0.00423 (USD)", Radiation Hardening=No, RoHS=Yes, RoHS Compliant=Yes, Series=RMCF, Stock 1=4769, Supplier 1=Digi-Key, Width=0.049inch
R4: "Res Thin Film 0805 4.99K Ohm 1% 0.25W(1/4W) ±100ppm/°C Sulfur Resistant Pad SMD T/R", Case Code (Imperial)=0805, Case Code (Metric)=2012, Manufacturer="Stackpole Electronics", Max Operating Temperature=155°C, Max Power Dissipation=250mW, Min Operating Temperature=-55°C, Resistance=4.99k, Resistor Type="Thin Film", Supplier Part Number 1=RNCP0805FTD4K99CT-ND, Temperature Coefficient=100ppm/°C, Tolerance=1%, Case/Package=0805, Category="Chip SMD Resistors", ComponentLink1Description=http://www.seielect.com/Catalog/SEI-rncp.pdf?src-supplier=Avnet, ComponentLink1URL=http://www.seielect.com/Catalog/SEI-rncp.pdf?src-supplier=Avnet, ComponentLink2Description=http://www.seielect.com/Catalog/SEI-rncp.pdf?src-supplier=Digi-Key, ComponentLink2URL=http://www.seielect.com/Catalog/SEI-rncp.pdf?src-supplier=Digi-Key, ComponentLink3Description=https://www.seielect.com/catalog/SEI-Packaging.pdf?src-supplier=Digi-Key, ComponentLink3URL=https://www.seielect.com/catalog/SEI-Packaging.pdf?src-supplier=Digi-Key, Contact Plating=Tin,Matte, Features="Moisture Resistant,Anti-Sulfur", Height=0.024inch, Length=0.079inch, Manufacturer Part Number=RNCP0805FTD4K99, Mount="Surface Mount", Number of Terminations=2, Packaging="Tape and Reel", Pricing 1="1=0.10000, 10=0.07300, 100=0.02970, 1000=0.01336, 2500=0.01159 (USD)", Radiation Hardening=No, RoHS=Yes, RoHS Compliant=Yes, Series=RNCP, Stock 1=70656, Supplier 1=Digi-Key, Width=0.049inch
R5: "Res SMD 5K Ohm 5% 1/8W 0805", Case Code (Imperial)=0805, Case Code (Metric)=2012, Manufacturer="Vishay Dale", Max Operating Temperature=155°C, Max Power Dissipation=125mW, Min Operating Temperature=-55°C, Package Quantity=5000, Resistance=5k, Resistor Type="Thick Film", Supplier Part Number 1=541-CRCW08055K00JNTACT-ND, Temperature Coefficient=200ppm/°C, Tolerance=5%, Voltage Rating=150V, Case/Package=0805, Category="Chip SMD Resistors", ComponentLink1Description=http://www.mouser.com/ds/2/427/dcrcw-72725.pdf?src-supplier=Mouser, ComponentLink1URL=http://www.mouser.com/ds/2/427/dcrcw-72725.pdf?src-supplier=Mouser, ComponentLink2Description=http://www.vishay.com/docs/20008/dcrcw.pdf?src-supplier=Digi-Key, ComponentLink2URL=http://www.vishay.com/docs/20008/dcrcw.pdf?src-supplier=Digi-Key, Features="Automotive AEC-Q200", Height=0.02inch, Lead Free="Contains Lead", Length=0.079inch, Manufacturer Part Number=CRCW08055K00JNTA, Number of Terminations=2, Packaging="Tape and Reel", Power Rating=125mW, Pricing 1="1=0.14000, 10=0.12100, 100=0.04660, 1000=0.02049, 2500=0.01770 (USD)", RoHS=No, RoHS Compliant=No, Series=CRCW, Stock 1=3439, Supplier 1=Digi-Key, Termination=SMD/SMT, Weight=0.000194oz, Width=0.049inch
R6: library part RMCF0805JT1K60, "Res Thick Film 0805 1.6K Ohm 5% 1/8W ±100ppm/°C Molded SMD SMD Paper T/R", Case Code (Imperial)=0805, Case Code (Metric)=2012, Manufacturer="Stackpole Electronics", Max Operating Temperature=155°C, Max Power Dissipation=125mW, Min Operating Temperature=-55°C, Resistance=1.6kR, Resistor Type="Thick Film", Supplier Part Number 1=RMCF0805JT1K60CT-ND, Temperature Coefficient=200ppm/°C, Tolerance=5%, Case/Package=0805, Category="Chip SMD Resistors", ComponentLink1Description=https://www.seielect.com/Catalog/SEI-RMCF_RMCP.pdf?src-supplier=Digi-Key, ComponentLink1URL=https://www.seielect.com/Catalog/SEI-RMCF_RMCP.pdf?src-supplier=Digi-Key, ComponentLink2Description=https://www.seielect.com/catalog/SEI-RMCF_RMCP.pdf?src-supplier=Avnet, ComponentLink2URL=https://www.seielect.com/catalog/SEI-RMCF_RMCP.pdf?src-supplier=Avnet, ComponentLink3Description=http://components.arrow.com/part/dataview/50587586S206405N1174?src-supplier=Arrow+Electronics, ComponentLink3URL=http://components.arrow.com/part/dataview/50587586S206405N1174?src-supplier=Arrow+Electronics, Contact Plating=Tin,Matte, Features="Automotive AEC-Q200", Height=0.026inch, Length=0.079inch, Manufacturer Part Number=RMCF0805JT1K60, Mount="Surface Mount", Number of Terminations=2, Packaging="Tape and Reel", Pricing 1="1=0.10000, 10=0.02000, 100=0.00810, 1000=0.00366, 2500=0.00318 (USD)", Radiation Hardening=No, RoHS=Yes, RoHS Compliant=Yes, Series=RMCF, Stock 1=7488, Supplier 1=Digi-Key, Width=0.049inch
R7: library part CRCW080543K0JNEA, "Res Thick Film 0805 43K Ohm 5% 0.125W(1/8W) ±200ppm/C Molded SMD Automotive Paper T/R", Case Code (Imperial)=0805, Case Code (Metric)=2012, Manufacturer="Vishay Dale", Max Operating Temperature=155°C, Max Power Dissipation=125mW, Min Operating Temperature=-55°C, Package Quantity=5000, Resistance=43kR, Resistance Tolerance=5%, Resistor Type="Thick Film", Supplier Part Number 1=541-43KACT-ND, Temperature Coefficient=200ppm/°C, Voltage Rating=150V, Case/Package=0805, Category="Chip SMD Resistors", ComponentLink1Description=https://datasheet.ciiva.com/9008/dcrcwe3-9008904.pdf?src-supplier=Avnet, ComponentLink1URL=https://datasheet.ciiva.com/9008/dcrcwe3-9008904.pdf?src-supplier=Avnet, Construction=Rectangular, Contact Plating=Tin, Depth=1.25mm, Features="Automotive AEC-Q200", Height=0.45mm, Lead Free="Lead Free", Length=2mm, Manufacturer Part Number=CRCW080543K0JNEA, Military Standard=Not, Number of Pins=2, Number of Terminations=2, Packaging="Tape and Reel", Power Rating=125mW, Pricing 1="1=0.10000, 10=0.05000, 100=0.02040, 1000=0.00914, 2500=0.00794 (USD)", REACH SVHC=Unknown, RoHS=Yes, RoHS Compliant=Yes, Series=CRCW, Size Code=0805, Stock 1=6239, Supplier 1=Digi-Key, Tolerance=5%, Voltage Rating (DC)=150V, Weight=0.000194oz, Width=1.25mm
R8: library part KDV08FR180ET, "0.18 Ohm 0805 1% 0.25W Rohs Compliant: Yes", Manufacturer=Ohmite, Supplier Part Number 1=273-KDV08FR180ETCT-ND, Category="Chip SMD Resistors", Manufacturer Part Number=KDV08FR180ET, Pricing 1="1=0.29000, 10=0.24200, 25=0.17600, 50=0.12760, 100=0.09460, 250=0.07260, 500=0.05720, 1000=0.03960 (USD)", RoHS=No, Stock 1=15787, Supplier 1=Digi-Key
R9: library part RMCF0805FG22K1, "Res Thick Film 0805 22.1K Ohm 1% 1/8W 100ppm/C Molded SMD SMD Paper T/R", Case Code (Imperial)=0805, Case Code (Metric)=2012, Manufacturer="Stackpole Electronics", Max Operating Temperature=155°C, Max Power Dissipation=125mW, Min Operating Temperature=-55°C, Package Quantity=10000, Resistance=22.1kR, Resistor Type="Thick Film", Supplier Part Number 1=RMCF0805FG22K1CT-ND, Temperature Coefficient=100ppm/°C, Tolerance=1%, Case/Package=0805, Category="Chip SMD Resistors", ComponentLink1Description=https://www.seielect.com/catalog/SEI-RMCF_RMCP.pdf?src-supplier=Avnet, ComponentLink1URL=https://www.seielect.com/catalog/SEI-RMCF_RMCP.pdf?src-supplier=Avnet, ComponentLink2Description=http://www.seielect.com/Catalog/SEI-RMCF_RMCP.pdf?src-supplier=Digi-Key, ComponentLink2URL=http://www.seielect.com/Catalog/SEI-RMCF_RMCP.pdf?src-supplier=Digi-Key, ComponentLink3Description=https://www.seielect.com/catalog/SEI-Packaging.pdf?src-supplier=Digi-Key, ComponentLink3URL=https://www.seielect.com/catalog/SEI-Packaging.pdf?src-supplier=Digi-Key, ComponentLink4Description=https://www.seielect.com/Catalog/SEI-RMCF_RMCP.pdf?src-supplier=Digi-Key, ComponentLink4URL=https://www.seielect.com/Catalog/SEI-RMCF_RMCP.pdf?src-supplier=Digi-Key, Contact Plating=Tin,Matte, Features="Automotive AEC-Q200", Height=0.026inch, Lead Free="Lead Free", Length=0.079inch, Manufacturer Part Number=RMCF0805FG22K1, Mount="Surface Mount", Number of Terminations=2, Packaging="Tape and Reel", Pricing 1="1=0.10000, 10=0.02700, 100=0.01090, 1000=0.00488, 2500=0.00423, 5000=0.00350 (USD)", Radiation Hardening=No, RoHS=Yes, RoHS Compliant=Yes, Series=RMCF, Stock 1=16110, Supplier 1=Digi-Key, Width=0.049inch
U1: "IC REG CTRLR FLYBACK 20TSSOP", Manufacturer="Analog Devices / Linear Technology", Supplier Part Number 1=LT8315EFE#PBF-ND, Category="Voltage Regulators - Switching", ComponentLink1Description=http://www.linear.com/docs/56703?src-supplier=Digi-Key, ComponentLink1URL=http://www.linear.com/docs/56703?src-supplier=Digi-Key, Manufacturer Part Number=LT8315EFE#PBF, Pricing 1="1=9.84000, 10=8.88800, 25=8.47480, 100=7.35850, 250=7.02780, 500=6.43500 (USD)", RoHS=Yes, RoHS Compliant=Yes, Stock 1=22, Supplier 1=Digi-Key

## Free pads (board coordinates)
  round 5 hole 4: 3(4,4) 3(4,41) 3(56,41) 3(56,4)

## Via types
v1: diameter 1.27, hole 0.711, Top Layer to Bottom Layer, 13 vias

## Nets (pads, with @x,y where several pads share a name; then routed paths per layer and width w, separated by ;. In a path a pad name is that pad's centre, name@x,y a point inside that pad or via, vN(x,y) a via of type N, cw(c..) or ccw(c..) an arc to the next point about the centre after c; other vN are vias at no path point)
BIAS: BIAS1.1 C4.2 D1.1 R2.1 U1.9 | length 33.9
  Top Layer w0.254: U1.9 19.569,32.181 20.233,32.181 23.5,28.914 D1.1 ; 25.475,35.475 25.519,35.519 ; R2.1 34.984,36 v1(35,35.984) 35.016,36 C4.2@36.9,36
  Bottom Layer w0.254: v1(23.5,28) 23.586,28.086 23.586,30.836 28.75,36 34.984,36 v1(35,35.984)
DCM: DCM1.1 R4.2 U1.10 | length 10.6
  Top Layer w0.254: R4.2 DCM1.1 19.5,31.55 U1.10
DCM2: C3.2 R4.1 | length 2.5
  Top Layer w0.254: C3.2 19.3,19 R4.1
FB: JP1.1 R3.1 R5.2 U1.12 | length 27.1
  Top Layer w0.254: U1.12 25.519,32.181 26.319,32.181 28.8,29.7 R3.1 31.7,14.5 JP1.1 36,14.3 R5.2
FB2: D1.2 D2.1 FB1.1 R3.2 | length 12.6
  Top Layer w0.254: D1.2 FB1.1 R3.2 27,10.075 27.527,9.548 27.577,9.548 28,9.125 D2.1
GND: C1.2 C2.2 C7.1 C8.1 D3.2 D4.2 GND1.1 J1.2 J2.2 pad.3 | length 7.9
  Top Layer w0.254: v1@24.65,9.75 v1(24.7,9.8) ; D4.2@53.98,31.25 56.05,31.25 v1(56.1,31.3)
  Top Layer w0.508: GND1.1@19.225,5.625 19.5,5.9 v1(19.5,7.5) ; D3.2 v1@24.65,9.75 ; C7.1@33,7.6 v1@33,9.45
  other v1: 38,9.9 33,10 2.1,27.7 5.2,27.7
INTV: C5.2 INTV1.1 U1.8 | length 34.2
  Top Layer w0.254: 19.305,33.125 19.305,34.03 19.6,34.325 v1(19.6,34.6) ; v1(30.5,20.3) 30.75,20.3 INTV1.1@33,20.3 ; v1@30.75,20.25 33,20.25 36.25,20.25 C5.2@36.5,20.5
  Bottom Layer w0.254: v1(19.6,34.6) 19.6,21.9 21.2,20.3 v1(30.5,20.3)
IREG: IREG1.1 R7.2 U1.14 | length 11.7
  Top Layer w0.254: U1.14 25.519,33.481 29.519,33.481 IREG1.1 R7.2@36.1,32 ; R7.2@36.6,32.5 R7.2@37.05,32.5
PRE-GND: C4.1 C5.1 D4.1 L1.1 PRE-GND1.1 R5.1 R6.2 R7.1 R8.1 R9.1 U1.15 U1.16 U1.20 U1.21 | length 14.6
  Top Layer w0.635: U1.21@22.75,36.193 22.75,35.1 U1.21@22.775,35.075 ; 24.605,34.675 25.475,34.675 38.114,34.675
SOURCE: JP3.1 R8.2 U1.18 | length 12.8
  Top Layer w0.254: U1.18 26.706,36.125 27.72,37.139 28.388,37.139 30.449,39.2 36.578,39.2 R8.2
UVLO: R1.2 R2.2 R6.1 U1.17 UVLO.1 | length 24.6
  Top Layer w0.254: R1.2 18.528,40 19.028,40.5 UVLO.1 24.725,40.5 R6.1 26.854,40.746 v1(26.9,40.7) ; U1.17 25.519,35.519 27.737,35.519 28.218,36 29.593,36 ; R2.2@30.594,35.475 30.967,35.848 R2.2 29.593,36 ; v1(31.2,37.9) 31.034,37.9 29.593,36.458 29.593,36
  Bottom Layer w0.254: v1(26.9,40.7) 28.5,40.7 31.2,38 v1(31.2,37.9)
VC: C6.2 JP2.1 U1.13 | length 11.9
  Top Layer w0.254: U1.13 27.125,32.875 30.5,29.5 JP2.1 C6.2
VC2: C6.1 R9.2 | length 2.9
  Top Layer w0.254: C6.1@33.75,26 34,25.75 R9.2@36.575,25.75
Vin: C1.1 C2.1 C3.1 J1.1 R1.1 U1.1 U1.2 U1.3
Vout: C7.2 C8.2 D2.2 D3.1 J2.1 L1.2 VOUT1.1
pads on no net: D3.3 U1.11 U1.19
copper on no net: | length 1.9
  Top Layer w0.508: 38,8 38,9.9

## Polygon pours and split planes (outlines as drawn)
PRE-GND on Top Layer "PRE-GND_L01_P010" (solid, pour order 10): 21.2,31.4 21.2,39.9 26.2,39.9 26.2,31.4
PRE-GND on Top Layer "PRE-GND_L01_P008" (solid, pour order 8): 37.575,13 37.575,24.15 37.575,29.65 37.575,30.4 37.575,31.2 37.575,35.575 37.575,40 41,40 41.5,40 52.15,40 52.15,37.125 52.15,27.9 58.175,27.9 58.175,18.45 58.05,18.575 39.275,18.575 39.275,13
Vout on Top Layer "VOUT_L01_P006" (solid, pour order 6): 23.6,7 23.5,6.9 23.5,4 53.5,4 53.5,7.7 58,7.7 58,17.6 40.5,17.6 40.5,6.9
Vin on Top Layer "VIN_L01_P012" (solid, pour order 12): 5.2,13 16.6,13 16.6,35.6 20.5,35.6 20.5,38.9 9.1,38.9 9.1,23.4 5.2,23.4
GND on Top Layer "GND_L01_P014" (solid, pour order 14): 7.9,34 7.9,24.5 4.4,24.5 4.2,24.3 4.2,17 0.6,17 0.6,34
GND on Bottom Layer "GND_L02_P009" (solid, pour order 9): 0,0 60,0 60,45 0,45

## Silkscreen, mask and mechanical layers (free items; w line width, h text height)
Top Overlay:
  text "Vin" at 8.6,13.6 h1.58
  text "GND" at 8.5,10.6 h1.58
  text "+" at 46.5,6.9 h1.58
  text "-" at 49.1,6.9 h1.58
  text "5V Buck  / Eval  / Board / REV 0" at 8.8,2.4 h1
Bottom Overlay:
  text "Kimia Rezaeian" at 20.329,37.552 h1.58
  text "1" at 16.9,25.3 h8
  text "This is an Eval Board made to test a Buck converter.  / The input is 30V - 560V, and is expected to produce 5V at 0.2A" at 52.8,23.2 h1
  text "Vin" at 13,13.6 h1.58
  text "GND" at 13.4,10.7 h1.58
  text "GND" at 48.9,7.7 h1.58 r270
  text "Vout" at 46.2,7.3 h1.58 r270
Board Outline:
  the board outline again, w0.08